# Altium PCB CSU18M88+CS1259-V1.1.PcbDoc (part 1 of 2)
Units mm, origin at the board's own origin, x right, y up, seen from the top; angles counter-clockwise.
Board outline 33.46 x 68.06 mm, 2 copper layers (TopLayer, BottomLayer); 63 components, 66 nets, 230 pads, 165 vias.
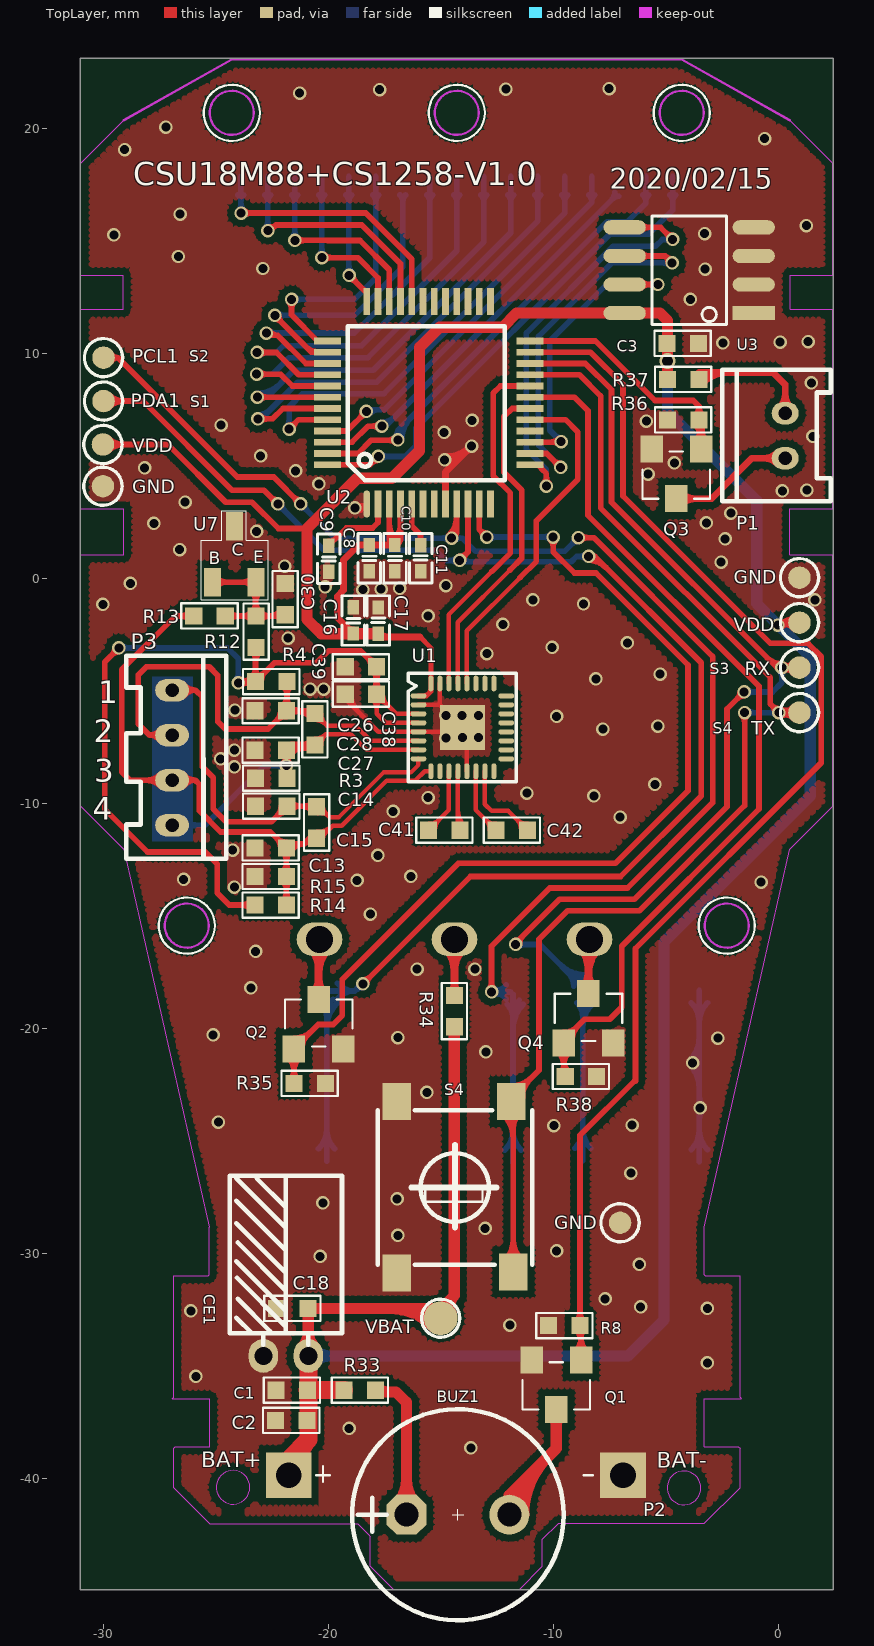
[diagram p0: TopLayer view]
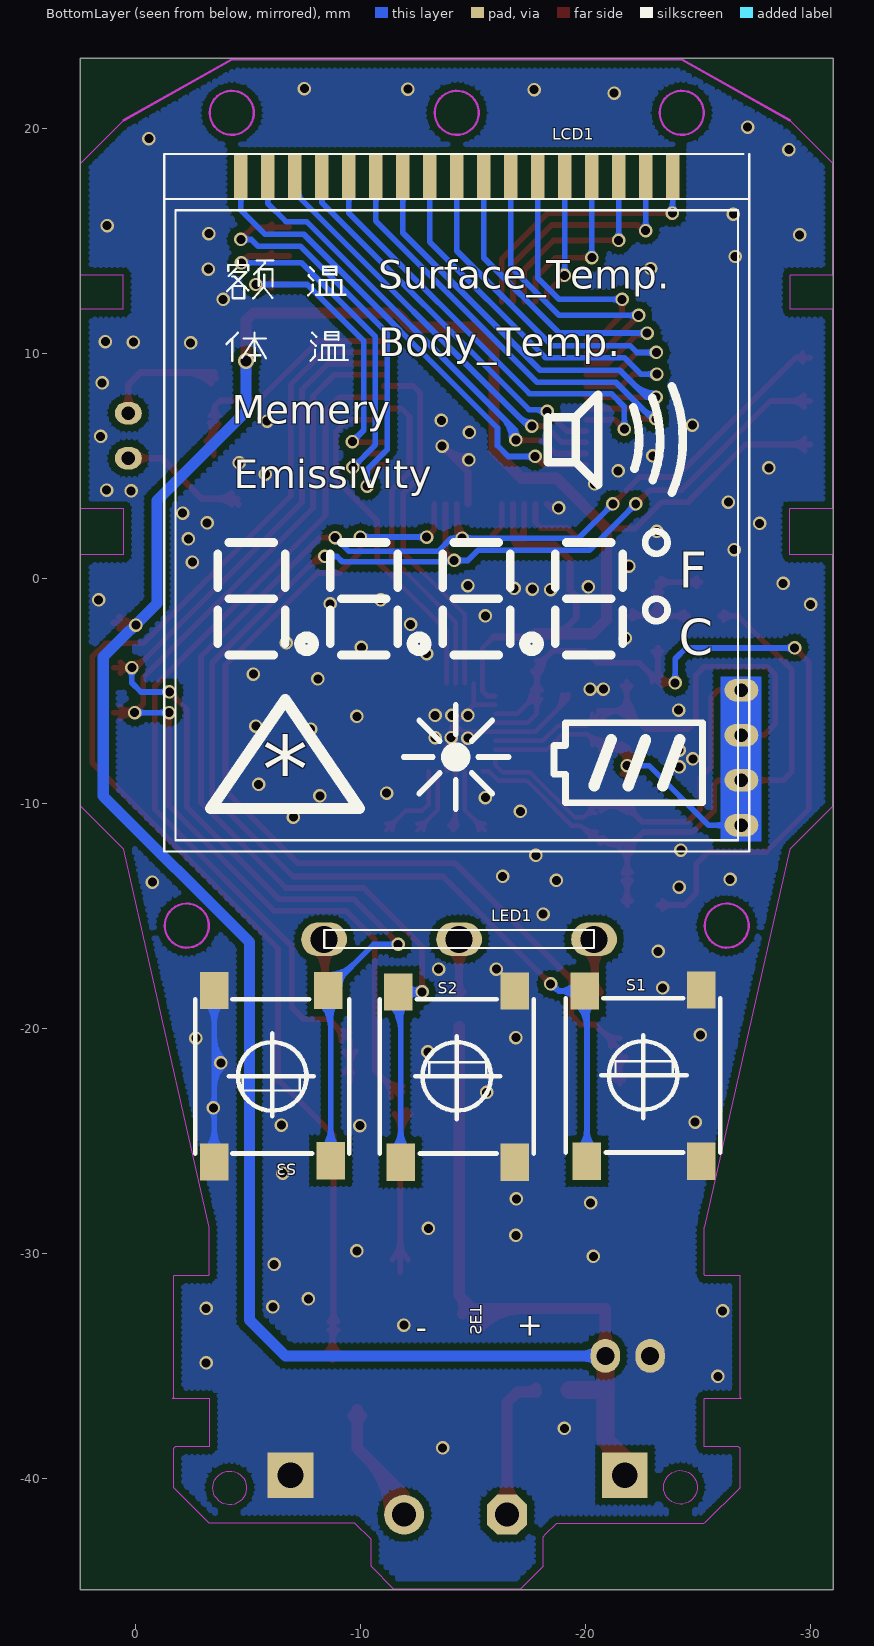
[diagram p1: BottomLayer view, seen from below]

## Layer stack, top to bottom
TopLayer: signal copper 0.0356
Dielectric: dielectric 0.32, FR-4, Dk 4.8
BottomLayer: signal copper 0.0356

## Board outline
-31.025,-44.958 2.436,-44.958 2.436,23.106 -31.025,23.106

## Design rules (kind name [scope] priority, off if disabled: settings)
Clearance [All] p1: gap=0.3
ComponentClearance [All] p1 off: gap=0.254 collisioncheckmode=3 verticalgap=0.254 showdistances=FALSE
FabricationTestPointUsage TestPointUsage [All] p1 off: valid=0 allowmultiple=FALSE
FabricationTestpoint Testpoint [All] p1 off: side=3 testpointundercomponent=TRUE minsize=1.016 maxsize=2.54 preferedsize=1.524 minholesize=0.508 maxholesize=1.016 preferedholesize=0.813 testpointgrid=0.025 allowsidetop=TRUE allowsidebottom=TRUE usegrid=TRUE gridtolerance=0
PasteMaskExpansion [All] p1 off: expansion=0
PlaneClearance [All] p1 off: clearance=0.508
PlaneConnect [All] p1 off: planeconnectstyle=Relief reliefexpansion=0.508 reliefentries=4 reliefconductorwidth=0.254 reliefairgap=0.254
PolygonConnect [All] p1: connectstyle=Direct reliefconductorwidth=0.508 reliefentries=4 polygonreliefangle="90 Angle" airgapwidth=0.254
RoutingCorners [All] p1: cornerstyle=45-Degree minsetback=0.203 maxsetback=25.4
RoutingVias [All] p1: holewidth=0.432 width=0.813 viastyle="Through Hole" minholewidth=0.432 minwidth=0.813 maxholewidth=0.432 maxwidth=0.813
SilkscreenOverComponentPads [All] p1: minsilkscreentomaskgap=0.254
SolderMaskExpansion [All] p1 off: expansion=0.102
Width [All] p1: maxlimit=5.08 minlimit=0.025 preferedwidth=0.191
20 further rules are at their usual default settings.

## Classes and differential pairs
component class CSU18M88+CS1258额温枪-V1.0: BUZ1 C1 C2 C3 C10 C11 C13 C14 C15 C18 C26 C27 C28 C30 C38 C39 C41 C42 GND GND2 LCD1 LED1 LED2 P1 PCL1 PDA1 Q1 Q2 Q3 Q4 R3 R4 R8 R12 R13 R14 R15 R33 R34 R35 R36 R37 R38 RX S1 S2 S3 S4 TX U1 U2 U3 U6 U7 VBAT VDD2

## Components (designator, comment, footprint, x,y, rotation, side; value= is the part's Value field where it differs from the comment)
BUZ1 "BUZZER" BUZS9.5*6 -16.53,-41.631 r0 top
C1 "10uF" C0603E -20.93,-36.093 r180 top
C2 "0.1uF" C0603E -20.955,-37.44 r180 top
C3 "100nF" C0603E -4.953,10.439 r0 top
C8 "10uF" C0402 -18.186,1.473 r270 top (schematic designator C10)
C9 "1uF" C0402 -19.99,1.448 r270 top (schematic designator C10)
C10 "0.1uF" C0402 -17.043,1.473 r270 top
C11 "1uF" C0402 -15.9,0.305 r90 top
C13 "120pF" C0603E -21.869,-11.989 r180 top
C14 "120pF" C0603E -23.241,-10.135 r0 top
C15 "NC" C0603E -20.523,-11.557 r90 top
C16 "10uF" C0402 -18.898,-1.295 r270 top (schematic designator C10)
C17 "0.1uF" C0402 -17.78,-2.464 r90 top (schematic designator C10)
C18 "0.1uF" C0603E -20.904,-32.461 r180 top
C26 "120pF" C0603E -23.266,-5.893 r0 top
C27 "120pF" C0603E -21.869,-7.645 r180 top
C28 "NC" C0603E -20.599,-7.417 r90 top
C30 "NC" C0603E -21.92,-0.229 r270 top
C38 "1uF" C0603E -17.856,-5.156 r180 top
C39 "120pF" C0603E -17.856,-3.937 r180 top
C41 "0.1uF" C0603E -14.148,-11.201 r180 top
C42 "NC" C0603E -12.548,-11.201 r0 top
CE1 "220UF/10V" CD11C5X7W -21.895,-34.569 r180 top
GND "" "TEST-SMD 1.5"#1 -7.036,-28.651 r90 top (schematic designator GND2)
GND "" "TEST-SMD 1.5"#1 -30.023,4.089 r90 top (schematic designator GND2)
GND "" "TEST-SMD 1.5"#1 0.94,0.025 r90 top (schematic designator GND2)
LCD1 "13x4" LCD_13X4_TZL3304_体温 -14.295,17.856 r180 bottom locked
LED1 "白光" YTSG-3326E-1PRGF03B -14.396,-16.053 r0 bottom locked
P1 "激光（NC)SIP2" COM-2 0.305,5.334 r90 top
P2 "电池" 1809BAT -21.768,-39.878 r0 top
P3 "DIP4" COM-4 -26.949,-4.978 r270 top
PCL1 "" "TEST-SMD 1.5"#1 -29.997,9.804 r90 top
PDA1 "" "TEST-SMD 1.5"#1 -29.997,7.874 r90 top
Q1 "S8050" SOT-23S -9.855,-36.957 r180 top
Q2 "S8050" SOT-23S -20.447,-18.72 r0 top
Q3 "S8050" SOT-23S -4.521,3.531 r180 top
Q4 "S8050" SOT-23S -8.458,-18.466 r0 top
R3 "51K0.1%" R0603E -21.844,-8.89 r180 top
R4 "51K0.1%" R0603E -23.241,-4.597 r0 top
R8 "100K" R0603E -8.814,-33.223 r180 top
R12 "NC" R0603E -23.216,-3.073 r90 top
R13 "NC" R0603E -24.587,-1.676 r180 top
R14 "10K" R0603E -21.869,-14.529 r180 top
R15 "10K" R0603E -23.266,-13.259 r0 top
R33 "" R0603E -19.304,-36.093 r0 top
R34 "330" R0603E -14.402,-19.939 r90 top
R35 "100K" R0603E -21.533,-22.46 r0 top
R36 "100K" R0603E -3.531,7.036 r180 top
R37 "470R" R0603E -4.928,8.839 r0 top
R38 "100K" R0603E -9.474,-22.149 r0 top
RX "" "TEST-SMD 1.5"#1 0.94,-3.975 r0 top
S1 "UP" SW-4X6_SMD -22.575,-22.098 r180 bottom locked
S2 "SET" SW-4X6_SMD -14.295,-22.144 r180 bottom locked
S3 "DOWN" SW-4X6_SMD -6.095,-22.144 r0 bottom locked
S4 "UNIT" SW-4X6 -14.371,-27.076 r180 top locked
TX "" "TEST-SMD 1.5"#1 0.94,-5.975 r0 top
U1 "CS1258" QFN32_4X4 -14.046,-6.629 r90 top locked
U2 "CSU18M88-LQFP48" LQFP48 -15.545,7.798 r90 top locked
U3 "24C02" SMD8 -1.092,11.786 r90 top locked
U7 "TL432-0.5%(NC)" SOT-23-1B2E3C -25.146,-0.178 r0 top
VBAT "" "TEST-SMD 1.5"#2 -15.011,-32.893 r90 top (schematic designator VDD2)
VDD "" "TEST-SMD 1.5"#1 -30.023,5.944 r0 top (schematic designator TX)
VDD "" "TEST-SMD 1.5"#1 0.94,-1.975 r0 top (schematic designator TX)

## Footprints (in the part's own frame and the unit in brackets; to place one, negate y for a bottom-side part, rotate by r counter-clockwise, add the part's x,y. Pads: shape width x height; smd on the part's side, far side on the other; paste and mask are expansions set on the pad)
1809BAT [mil]
  rect 80x80 hole 45: 1(0.06,0.33) 2(585.06,0.33)
  silkscreen extent 48,-12 532,16
BUZS9.5*6 [mil]
  oct 70x70 hole 42: 1(0,0)
  round 70 hole 42: 2(180,0)
  silkscreen extent -95,-185 275,185
C0402 [mil]
  rect 25x20 smd: 1(0,0) 2(45.87,0)
  silkscreen extent -20,-20 66,20
C0603E [mil]
  rect 30x30 smd: 1(0,0) 2(55,0)
  silkscreen extent -22,-22 77,22
CD11C5X7W [mm]
  oval 1.3x1.5 hole 0.8: 1(-1,0) 2(1,0)
  silkscreen extent -2.5,-8 2.5,-0.5
COM-2 [mm]
  oval 1x1.2 hole 0.6: 1(0,0) 2(2,0)
  silkscreen extent -1.91,-2.03 3.94,2.79
COM-4 [mm]
  oval 1x1.5 hole 0.6: 1(0,0) 2(2,0) 3(4,0) 4(6,0)
  silkscreen extent -1.52,-2.03 7.49,2.41
LCD_13X4_TZL3304_体温 [mm]
  rect 0.6x2 smd: 1(9.6,0) 2(8.4,0) 3(7.2,0) 4(6,0) 5(4.8,0) 6(3.6,0) 7(2.4,0) 8(1.2,0) 9(0,0) 10(-1.2,0) 11(-2.4,0) 12(-3.6,0) 13(-4.8,0) 14(-6,0) 15(-7.2,0) 16(-8.4,0) 17(-9.6,0)
  silkscreen extent -13,-30 13,1
LQFP48 [mm]
  oval 1.2x0.3 smd: 1(-4.5,2.75)
  rect 1.2x0.3 smd: 2(-4.5,2.25) 3(-4.5,1.75) 4(-4.5,1.25) 5(-4.5,0.75) 6(-4.5,0.25) 7(-4.5,-0.25) 8(-4.5,-0.75) 9(-4.5,-1.25) 10(-4.5,-1.75) 11(-4.5,-2.25) 12(-4.5,-2.75) 25(4.5,-2.75) 26(4.5,-2.25) 27(4.5,-1.75) 28(4.5,-1.25) 29(4.5,-0.75) 30(4.5,-0.25) 31(4.5,0.25) 32(4.5,0.75) 33(4.5,1.25) 34(4.5,1.75) 35(4.5,2.25) 36(4.5,2.75)
  rect 0.3x1.2 smd: 13(-2.75,-4.5) 14(-2.25,-4.5) 15(-1.75,-4.5) 16(-1.25,-4.5) 17(-0.75,-4.5) 18(-0.25,-4.5) 19(0.25,-4.5) 20(0.75,-4.5) 21(1.25,-4.5) 22(1.75,-4.5) 23(2.25,-4.5) 24(2.75,-4.5) 37(2.75,4.5) 38(2.25,4.5) 39(1.75,4.5) 40(1.25,4.5) 41(0.75,4.5) 42(0.25,4.5) 43(-0.25,4.5) 44(-0.75,4.5) 45(-1.25,4.5) 46(-1.75,4.5) 47(-2.25,4.5) 48(-2.75,4.5)
  silkscreen extent -3.45,-3.39 3.41,3.59
QFN32_4X4 [mm]
  oval 0.23x0.7 smd: 1(1.4,1.95) 2(1,1.95) 3(0.6,1.95) 4(0.2,1.95) 5(-0.2,1.95) 6(-0.6,1.95) 7(-1,1.95) 8(-1.4,1.95) 17(-1.4,-1.95) 18(-1,-1.95) 19(-0.6,-1.95) 20(-0.2,-1.95) 21(0.2,-1.95) 22(0.6,-1.95) 23(1,-1.95) 24(1.4,-1.95)
  oval 0.7x0.23 smd: 9(-1.95,1.4) 10(-1.95,1) 11(-1.95,0.6) 12(-1.95,0.2) 13(-1.95,-0.2) 14(-1.95,-0.6) 15(-1.95,-1) 16(-1.95,-1.4) 25(1.95,-1.4) 26(1.95,-1) 27(1.95,-0.6) 28(1.95,-0.2) 29(1.95,0.2) 30(1.95,0.6) 31(1.95,1) 32(1.95,1.4)
  rrect0% 2x2 smd: 33(0,0)
  silkscreen extent -2.42,-2.39 2.4,2.4
R0603E [mil]
  rect 30x30 smd: 1(0,0) 2(55,0)
  silkscreen extent -22,-22 77,22
SMD8 [mil]
  rect 25x74 smd: 1(0,0)
  oval 25x74 smd: 2(50,0) 3(100,0) 4(150,0) 5(150,226) 6(100,226) 7(50,226) 8(0,226)
  silkscreen extent -20,48 170,178
SOT-23-1B2E3C [mil]
  rect 30x50 smd: 1(0,0) 2(76,0) 3(38,98)
  silkscreen extent -20,-31 97,125
SOT-23S [mm]
  rect 1x1.2 smd: 1(-1.086,-2.202) 2(1.114,-2.202) 3(0.014,-0.002)
  silkscreen extent -1.49,-2.1 1.51,0
SW-4X6 [mil]
  rect 50x65 smd: 1(-102,148) 2(-98,-150) 3(102,-150) 4(102,150)
  silkscreen extent -135,-135 135,135
SW-4X6_SMD [mil]
  rect 50x65 smd: 1(-102.27,147.65) 2(-98.27,-150.35) 3(101.73,-150.35) 4(101.73,149.65)
  silkscreen extent -135,-135 135,135
"TEST-SMD 1.5"#1 [mm]
  round 1 smd: 1(0,0)
  silkscreen extent -0.85,-0.85 0.85,0.85
"TEST-SMD 1.5"#2 [mm]
  round 1.5 smd: 1(0,0)
  silkscreen extent -0.85,-0.85 0.85,0.85
YTSG-3326E-1PRGF03B [mm]
  oval 2.032x1.5 hole 1.2: 1(-6,0) 2(0,0) 3(6,0)
  silkscreen extent -6,-0.42 6,0.38

## Part data
BUZ1: library part Speaker
C1 C3: library part "Cap Semi", "Capacitor (Semiconductor SIM Model)"
C2 C13 C14 C15 C18 C26 C27 C28 C30: library part "Cap Semi", "Capacitor (Semiconductor S"
C11: library part CAP
LCD1: library part Compone
LED1: library part LED0, "Typical INFRARED GaAs LED"
P1 P2: library part He
Q1 Q2: library part NPN, "NPN三?"
Q3 Q4: library part N
R3 R4: library part Res1, "Resistor"
R8: library part R, "电?"
R12 R13 R14 R15 R33 R34 R37: library part Res1
S1 S2 S3 S4: library part SW-PB, "Switch"
U3: library part Component_2

## Via types
v1: diameter 0.6, hole 0.4, TopLayer to BottomLayer, 164 vias
v2: diameter 0.7, hole 0.5, TopLayer to BottomLayer, 1 vias

## Nets (pads, with @x,y where several pads share a name; then routed paths per layer and width w, separated by ;. In a path a pad name is that pad's centre, name@x,y a point inside that pad or via, vN(x,y) a via of type N, cw(c..) or ccw(c..) an arc to the next point about the centre after c; other vN are vias at no path point)
24C02_SCL: U2.14 U3.6 | length 20.7
  TopLayer w0.254: U2.14@-11.045,5.548 -10.298,5.548 v1(-9.677,4.928) ; v1@-9.85,4.928 ccw(c-10.268,4.928) -9.973,5.223 ccw(c-9.677,5.518) v1@-9.677,5.101 ; U3.6@-6.833,14.326 -5.029,14.326 v1(-4.724,14.021) ; U3.6@-6.076,14.191 cw(c-5.75,13.866) -5.75,14.326 cw(c-5.75,14.786) U3.6@-6.076,14.46 ; v1@-4.897,14.021 ccw(c-5.315,14.021) -5.02,14.316 ccw(c-4.724,14.611) v1@-4.724,14.194
  BottomLayer w0.254: v1@-9.85,4.928 ccw(c-10.268,4.928) -9.973,5.223 ccw(c-9.677,5.518) v1@-9.677,5.101 ; v1(-9.677,4.928) -10.668,5.918 -10.668,10.744 -7.391,14.021 v1(-4.724,14.021) ; v1@-4.847,13.898 ccw(c-5.142,13.603) -5.142,14.021 ccw(c-5.142,14.438) v1@-4.847,14.143
24C02_SDA: U2.13 U3.5 | length 22.8
  TopLayer w0.254: U2.13@-11.045,5.048 -10.712,5.048 -10.312,4.648 v1(-10.312,4.089) ; U2.13@-10.572,5.048 ccw(c-10.233,5.048) -10.473,4.808 ; v1@-10.435,4.212 ccw(c-10.73,4.507) -10.312,4.507 ccw(c-9.895,4.507) v1@-10.19,4.212 ; U3.5@-6.833,15.596 -5.232,15.596 v1(-4.699,15.062) ; U3.5@-6.076,15.461 cw(c-5.75,15.136) -5.75,15.596 cw(c-5.75,16.056) U3.5@-6.076,15.73 ; v1@-4.872,15.062 ccw(c-5.29,15.062) -4.994,15.358 ccw(c-4.699,15.653) v1@-4.699,15.235
  BottomLayer w0.254: v1@-10.435,4.212 ccw(c-10.73,4.507) -10.312,4.507 ccw(c-9.895,4.507) v1@-10.19,4.212 ; v1(-10.312,4.089) -10.312,4.826 -11.201,5.715 -11.201,10.898 -7.342,14.757 -5.461,14.757 -5.156,15.062 v1(-4.699,15.062) ; v1@-4.821,14.94 ccw(c-5.117,14.645) -5.117,15.062 ccw(c-5.117,15.48) v1@-4.821,15.185
24C02_WP: U2.15 U3.7 | length 16.7
  TopLayer w0.254: U2.15@-11.045,6.048 -9.675,6.048 v1(-9.652,6.071) ; -10.125,6.048 ccw(c-10.125,6.543) v1@-9.774,6.193 ; -10.015,6.048 cw(c-10.015,5.708) v1@-9.774,5.948 ; U3.7@-6.833,13.056 v1(-5.359,13.056) ; U3.7@-6.076,12.921 cw(c-5.75,12.596) -5.75,13.056 cw(c-5.75,13.516) U3.7@-6.076,13.19 ; v1@-5.482,12.933 ccw(c-5.777,12.638) -5.777,13.056 ccw(c-5.777,13.473) v1@-5.482,13.178
  BottomLayer w0.254: v1@-9.825,6.071 ccw(c-10.243,6.071) -9.947,6.366 ccw(c-9.652,6.661) v1@-9.652,6.244 ; v1(-9.652,6.071) -10.16,6.579 -10.16,10.541 -7.645,13.056 v1(-5.359,13.056) ; v1@-5.482,12.933 ccw(c-5.777,12.638) -5.777,13.056 ccw(c-5.777,13.473) v1@-5.482,13.178
AIN0: C26.2 C28.2 P3.2 R4.2 U1.6 | length 27.8
  TopLayer w0.2: C28.2@-20.599,-6.301 cw(c-20.599,-6.979) -20.12,-6.499 cw(c-19.64,-6.02) C28.2@-20.318,-6.02 ; C28.2@-20.599,-6.02 -20.066,-6.553 -18.796,-6.553 -18.12,-7.229 U1.6@-15.996,-7.229
  TopLayer w0.254: P3.2@-27.498,-7.203 ccw(c-27.947,-7.54) -27.947,-6.978 ; P3.2@-27.498,-6.754 cw(c-27.947,-6.417) -27.947,-6.978 ; P3.2@-26.949,-6.978 -27.947,-6.978 ; C26.2@-22.123,-5.893 cw(c-22.737,-5.893) -22.303,-6.326 cw(c-21.869,-6.76) C26.2@-21.869,-6.147 ; C26.2@-22.049,-5.713 ccw(c-22.544,-5.218) -21.844,-5.218 ; R4.2@-22.024,-4.777 cw(c-22.457,-5.211) -21.844,-5.211 cw(c-21.231,-5.211) R4.2@-21.664,-4.777 ; -21.844,-5.341 ccw(c-21.318,-5.341) -21.69,-5.713 ccw(c-21.256,-5.28) -21.256,-5.893 ccw(c-21.256,-6.506) C26.2@-21.69,-6.072 ; R4.2@-21.844,-4.597 -21.844,-5.867 C26.2@-21.869,-5.893 ; C26.2@-21.519,-5.893 cw(c-21.519,-6.94) C28.2@-20.779,-6.199 ; C28.2@-20.599,-5.893 C26.2@-21.869,-5.893 ; -27.947,-6.978 -28.448,-6.477 -28.448,-4.293 -28.092,-3.937 -25.298,-3.937 -24.917,-4.318 -24.917,-6.375 -24.587,-6.706 -22.682,-6.706 C26.2@-21.869,-5.893
AIN1: C27.1 C28.1 P3.4 R3.1 U1.7 | length 24.5
  TopLayer w0.2: C28.1@-20.599,-7.417 -20.117,-6.934 -18.999,-6.934 -18.304,-7.629 U1.7@-15.996,-7.629 ; C28.1@-20.599,-7.136 ccw(c-20.599,-6.457) -20.12,-6.937 ccw(c-19.64,-7.417) C28.1@-20.318,-7.417
  TopLayer w0.254: C27.1@-22.049,-7.825 cw(c-22.544,-8.32) v1@-21.844,-8.32 ; R3.1@-22.024,-8.71 ccw(c-22.457,-8.277) -21.844,-8.277 ccw(c-21.231,-8.277) R3.1@-21.664,-8.71 ; v1@-21.992,-8.454 cw(c-22.348,-8.81) R3.1@-21.844,-8.81 ; v1@-21.992,-8.209 ccw(c-22.348,-7.852) C27.1@-21.844,-7.852 ; v1@-21.982,-8.2 ccw(c-22.1,-8.063) -21.925,-8.016 ccw(c-21.684,-7.951) v1@-21.794,-8.176 ; v1@-21.955,-8.181 ccw(c-22.143,-7.853) -21.778,-7.951 ccw(c-21.454,-8.038) v1@-21.728,-8.231 ; R3.1@-21.844,-8.89 C27.1@-21.844,-7.671 ; R3.1@-21.844,-8.688 cw(c-21.513,-8.688) v1@-21.747,-8.454 ; v1@-21.844,-8.197 cw(c-21.318,-8.197) C27.1@-21.69,-7.825 ; C27.1@-21.844,-7.975 ccw(c-21.513,-7.975) v1@-21.747,-8.209
  TopLayer w0.3: C27.1@-21.918,-7.597 cw(c-21.484,-8.031) -21.484,-7.417 ; C27.1@-21.869,-7.645 -21.641,-7.417 C28.1@-20.599,-7.417 ; C27.1@-21.706,-7.809 cw(c-20.76,-8.755) C28.1@-20.76,-7.417 ; -21.246,-7.547 cw(c-21.065,-8.223) C28.1@-20.715,-7.617 ; -21.052,-7.495 ccw(c-21.16,-7.093) C28.1@-20.799,-7.301 ; C28.1@-20.763,-7.58 ccw(c-21.157,-7.974) -21.157,-7.417 ccw(c-21.157,-6.859) C28.1@-20.763,-7.253
  BottomLayer w0.254: P3.4@-26.949,-10.978 -25.482,-10.978 -22.835,-8.331 v1(-21.869,-8.331) ; P3.4@-26.436,-11.242 cw(c-25.799,-11.879) -25.799,-10.978 cw(c-25.799,-10.078) P3.4@-26.436,-10.715 ; v1@-21.992,-8.454 ccw(c-22.287,-8.749) -22.287,-8.331 ccw(c-22.287,-7.914) v1@-21.992,-8.209
AIN2: C14.2 C15.2 P3.1 U1.8 | length 22.6
  TopLayer w0.2: C15.2@-20.482,-10.438 cw(c-20.388,-11.067) -19.939,-10.617 ; C15.2@-20.422,-10.135 -19.939,-10.617 ; C15.2@-20.242,-10.16 ccw(c-19.87,-10.16) -20.133,-10.423 ; U1.8@-15.996,-8.029 -15.996,-8.3 -16.332,-8.636 -17.551,-8.636 -19.533,-10.617 -19.939,-10.617
  TopLayer w0.254: P3.1@-26.949,-4.978 -25.908,-4.978 ; P3.1@-26.412,-5.216 cw(c-25.908,-5.631) -25.908,-4.978 ; P3.1@-26.412,-4.741 ccw(c-25.908,-4.325) -25.908,-4.978 ; C14.2@-22.098,-10.135 cw(c-22.711,-10.135) -22.278,-10.568 cw(c-21.844,-11.002) C14.2@-21.844,-10.389 ; C14.2@-21.664,-10.314 cw(c-21.231,-10.748) -21.231,-10.135 cw(c-21.231,-9.521) C14.2@-21.664,-9.955 ; -21.198,-10.135 cw(c-21.198,-10.835) C15.2@-20.703,-10.34 ; -21.075,-10.135 ccw(c-21.075,-9.608) C15.2@-20.703,-9.98 ; C15.2@-20.422,-10.135 C14.2@-21.844,-10.135 -22.533,-10.824 -24.559,-10.824 -25.121,-10.262 -25.121,-8.865 -25.603,-8.382 -25.603,-5.283 -25.908,-4.978
AIN3: C13.1 C15.1 P3.3 R13.2 R14.1 R15.2 U1.9 | length 39.3
  TopLayer w0.2: C15.1@-20.521,-11.476 ccw(c-20.504,-10.959) -20.139,-11.325 ; C15.1@-20.514,-11.276 ccw(c-20.484,-10.326) -19.812,-10.998 ; C15.1@-20.371,-11.557 -19.812,-10.998 ; C15.1@-20.242,-11.557 cw(c-19.932,-11.557) C15.1@-20.151,-11.337 ; U1.9@-15.446,-8.579 -15.717,-8.579 -16.133,-8.996 -17.402,-8.996 -19.404,-10.998 -19.812,-10.998
  TopLayer w0.254: P3.3@-27.463,-9.242 ccw(c-28.1,-9.879) -28.1,-8.978 ccw(c-28.1,-8.078) P3.3@-27.463,-8.715 ; P3.3@-26.409,-9.212 cw(c-25.921,-9.604) -25.921,-8.978 ; P3.3@-26.409,-8.745 ccw(c-25.921,-8.353) -25.921,-8.978 ; R13.2@-26.164,-1.856 ccw(c-26.597,-2.29) -26.597,-1.676 ccw(c-26.597,-1.063) R13.2@-26.164,-1.497 ; R13.2@-25.984,-1.676 -26.797,-1.676 -29.185,-4.064 -29.185,-8.611 -28.817,-8.978 P3.3@-26.949,-8.978 -25.921,-8.978 ; C13.1@-22.123,-11.989 ccw(c-22.737,-11.989) -22.303,-11.555 ccw(c-21.869,-11.122) C13.1@-21.869,-11.735 ; R14.1@-22.049,-14.349 ccw(c-22.483,-13.916) -21.869,-13.916 ccw(c-21.256,-13.916) R14.1@-21.69,-14.349 ; R15.2@-22.049,-13.438 cw(c-22.483,-13.872) -21.869,-13.872 cw(c-21.256,-13.872) R15.2@-21.69,-13.438 ; R15.2@-22.049,-13.079 ccw(c-22.483,-12.646) -21.869,-12.646 ccw(c-21.256,-12.646) R15.2@-21.69,-13.079 ; C13.1@-22.049,-12.168 cw(c-22.483,-12.602) -21.869,-12.602 cw(c-21.256,-12.602) C13.1@-21.69,-12.168 ; R14.1@-21.869,-14.529 R15.2@-21.869,-13.259 ; R15.2@-21.869,-13.056 C13.1@-21.869,-11.989 ; C13.1@-21.655,-12.125 cw(c-21.082,-12.491) -21.082,-11.811 ; C15.1@-20.663,-11.769 ccw(c-20.847,-12.046) -21.082,-11.811 ; C15.1@-20.371,-11.557 C15.1@-20.523,-11.557 -20.828,-11.557 -21.082,-11.811 ; -25.921,-8.978 -25.73,-9.169 -25.73,-10.338 -24.79,-11.278 -22.581,-11.278 C13.1@-21.869,-11.989 ; C13.1@-21.869,-11.989 -21.869,-11.811 -21.082,-11.811
AMB: 
BLIGHT1: Q2.1 R35.1 U2.11 | length 50
  TopLayer w0.254: Q2.1@-21.797,-21.285 cw(c-22.434,-21.922) -21.533,-21.922 cw(c-20.633,-21.922) Q2.1@-21.269,-21.285 ; R35.1@-21.713,-22.28 ccw(c-22.146,-21.846) -21.533,-21.846 ccw(c-20.92,-21.846) R35.1@-21.354,-22.28 ; R35.1@-21.533,-22.46 Q2.1@-21.533,-20.922 -20.449,-19.837 -19.787,-19.837 -19.38,-19.431 -19.38,-17.831 -14.224,-12.675 -7.239,-12.675 -4.013,-9.449 -4.013,-3.861 -8.103,0.229 -9.068,0.229 -10.008,1.168 v1(-10.008,1.829) ; Q2.1@-21.533,-20.449 ccw(c-21.533,-19.307) -20.726,-20.114 ; Q2.1@-21.16,-20.822 cw(c-20.501,-20.822) -20.967,-20.356 ; U2.11@-13.295,3.298 -13.295,2.17 v1(-12.954,1.829) ; v1@-13.127,1.829 ccw(c-13.545,1.829) -13.249,2.124 ccw(c-12.954,2.419) v1@-12.954,2.002 ; v1@-10.13,1.706 cw(c-10.425,1.411) -10.008,1.411 cw(c-9.59,1.411) v1@-9.885,1.706
  BottomLayer w0.254: v1(-12.954,1.829) v1(-10.008,1.829) ; v1@-12.832,1.706 cw(c-12.536,1.411) -12.536,1.829 cw(c-12.536,2.246) v1@-12.832,1.951 ; v1@-10.13,1.706 ccw(c-10.425,1.411) -10.425,1.829 ccw(c-10.425,2.246) v1@-10.13,1.951
BLIGHT2: Q4.1 R38.1 U2.19 | length 43.9
  TopLayer w0.254: U2.19@-11.045,8.048 -9.064,8.048 -8.458,7.442 -8.458,2.794 -0.864,-4.801 -0.864,-10.262 -6.96,-16.358 -6.96,-19.075 -7.493,-19.609 -8.611,-19.609 -9.544,-20.543 Q4.1@-9.544,-20.668 -9.544,-22.358 R38.1@-9.5,-22.403 ; Q4.1@-9.808,-21.031 cw(c-10.445,-21.668) -9.544,-21.668 cw(c-8.644,-21.668) Q4.1@-9.281,-21.031 ; R38.1@-9.654,-21.969 ccw(c-9.918,-21.705) -9.544,-21.705 ; -9.544,-21.366 ccw(c-8.692,-21.366) R38.1@-9.295,-21.969 ; Q4.1@-9.544,-20.195 ccw(c-9.544,-19.355) -8.951,-19.949 ; Q4.1@-9.171,-20.568 cw(c-8.21,-20.568) -8.89,-19.888
BUZZER: Q1.1 R8.1 U2.23 | length 60.5
  TopLayer w0.254: U2.23@-11.045,10.048 -8.346,10.048 -6.909,8.611 -6.909,3.658 -0.356,-2.896 1.321,-2.896 1.905,-3.48 1.905,-8.204 -6.35,-16.459 -6.35,-22.352 ; Q1.1@-9.033,-34.391 ccw(c-9.669,-33.755) -8.769,-33.755 ccw(c-7.869,-33.755) Q1.1@-8.505,-34.391 ; R8.1@-8.993,-33.403 cw(c-9.535,-33.945) -8.769,-33.945 ; R8.1@-8.993,-33.044 ccw(c-9.427,-32.61) -8.814,-32.61 ccw(c-8.201,-32.61) R8.1@-8.634,-33.044 ; R8.1@-8.814,-33.223 -8.814,-24.765 -6.401,-22.352 ; Q1.1@-8.769,-34.755 R8.1@-8.769,-33.223 ; -8.769,-33.728 cw(c-8.309,-33.728) R8.1@-8.634,-33.403
COM0: LCD1.17 U2.48 | length 24
  TopLayer w0.254: U2.48@-20.045,5.048 -18.142,5.048 v1(-17.78,5.41) ; v1@-17.953,5.41 cw(c-18.371,5.41) -18.075,5.115 cw(c-17.78,4.82) v1@-17.78,5.237
  BottomLayer w0.254: v1(-17.78,5.41) -16.586,5.41 -16.104,5.893 -16.104,6.68 -7.493,15.291 -5.766,15.291 -4.695,16.362 LCD1.17@-4.695,17.856 ; v1@-17.658,5.288 cw(c-17.362,4.993) -17.362,5.41 cw(c-17.362,5.828) v1@-17.658,5.533 ; LCD1.17@-4.817,17.034 cw(c-5.112,16.739) -4.695,16.739 cw(c-4.277,16.739) LCD1.17@-4.572,17.034
COM1: LCD1.16 U2.47 | length 23.8
  TopLayer w0.254: U2.47@-20.045,5.548 -18.684,5.548 -18.102,6.129 -16.934,6.129 v1(-16.916,6.147) ; -17.376,6.129 ccw(c-17.376,6.606) v1@-17.039,6.269 ; -17.292,6.129 cw(c-17.292,5.771) v1@-17.039,6.024
  BottomLayer w0.254: v1@-17.036,6.271 ccw(c-17.307,6.553) -16.916,6.553 ; v1@-16.997,6.147 cw(c-16.212,6.147) -16.767,6.702 ; v1(-16.916,6.147) -16.916,6.553 ; v1@-16.796,6.271 cw(c-16.526,6.553) -16.916,6.553 ; v1@-16.743,6.147 cw(c-15.345,6.147) -16.334,7.136 ; LCD1.16@-6.017,17.034 cw(c-6.312,16.739) -5.895,16.739 cw(c-5.477,16.739) LCD1.16@-5.772,17.034 ; LCD1.16@-5.895,17.856 -5.895,16.661 -6.706,15.85 -7.62,15.85 -16.916,6.553
COM2: LCD1.15 U2.46 | length 19.3
  TopLayer w0.254: U2.46@-20.045,6.048 -18.946,6.048 -18.237,6.756 v1(-17.628,6.756) ; v1@-17.75,6.634 ccw(c-18.045,6.339) -18.045,6.756 ccw(c-18.045,7.174) v1@-17.75,6.879
  BottomLayer w0.254: v1(-17.628,6.756) -17.475,6.756 LCD1.15@-7.214,17.018 ; v1@-17.628,6.929 ccw(c-17.628,7.715) -17.072,7.159 ; -7.404,16.828 ccw(c-7.732,17.156) LCD1.15@-7.268,17.156 ; LCD1.15@-7.357,16.874 cw(c-7.095,16.612) LCD1.15@-7.095,16.983
COM3: LCD1.14 U2.45 | length 19
  TopLayer w0.254: U2.45@-20.045,6.548 -19.182,6.548 v1(-18.313,7.417) ; v1@-18.486,7.417 cw(c-18.904,7.417) -18.609,7.121 cw(c-18.313,6.826) v1@-18.313,7.244
  BottomLayer w0.254: v1(-18.313,7.417) -18.237,7.493 -17.501,7.493 -8.295,16.699 LCD1.14@-8.295,17.856 ; v1@-18.191,7.294 cw(c-17.712,6.815) -17.712,7.493 ; LCD1.14@-8.417,17.034 cw(c-8.712,16.739) -8.295,16.739 cw(c-7.877,16.739) LCD1.14@-8.172,17.034
CS1258_CS: U1.28 U2.17 | length 15.1
  TopLayer w0.2: U1.28@-13.846,-4.679 -13.846,-2.34 -11.481,0.025
  TopLayer w0.254: -11.481,0.025 -10.757,0.749 -10.757,2.553 -8.915,4.394 -8.915,6.502 -9.461,7.048 U2.17@-10.516,7.048
CS1258_SCL: U1.29 U2.18 | length 14.7
  TopLayer w0.2: U1.29@-14.246,-4.679 -14.246,-1.953 -11.926,0.368
  TopLayer w0.254: -11.926,0.368 -11.405,0.889 -11.405,3.919 -12.192,4.706 -12.192,7.188 -11.832,7.548 U2.18@-11.045,7.548
CS1258_SDA: U1.30 U2.20 | length 16.1
  TopLayer w0.2: U1.30@-14.646,-4.679 -14.646,-1.616 -12.726,0.304
  TopLayer w0.254: -12.726,0.304 -11.913,1.118 -11.913,3.785 -12.675,4.547 -12.675,8.23 -12.356,8.548 U2.20@-11.045,8.548
GND: C1.2 C2.2 C3.2 C8.2 C9.2 C10.2 C11.1 C13.2 C14.1 C16.1 C17.2 C18.2 C26.1 C27.2 C30.1 C38.2 C39.2 CE1.2 GND.1 P2.2 Q1.2 Q2.2 Q3.2 Q4.2 R3.2 R8.2 R15.1 R35.2 R36.2 R38.2 S1.3 S1.4 S2.3 S2.4 S3.3 S3.4 S4.3 S4.4 U1.2 U1.5 U1.13 U1.31 U1.33 U2.1 U2.8 U3.1 U3.2 U3.3 U3.4 U7.3 | length 38.3
  TopLayer w0.2: C38.2@-19.253,-5.156 -19.253,-5.359 -17.783,-6.829 U1.5@-15.996,-6.829 -14.576,-6.829 -14.376,-6.629 U1.33@-14.046,-6.629 ; C38.2@-19.172,-5.156 ccw(c-18.486,-5.156) -18.971,-5.641 ; C38.2@-18.972,-5.156 ccw(c-17.803,-5.156) -18.63,-5.983 ; U1.2@-15.996,-5.629 -15.046,-5.629 ; U1.31@-15.046,-4.679 -15.046,-5.629 ; U1.13@-13.846,-8.579 -13.846,-7.464 -14.046,-7.264 U1.33@-14.046,-6.629 ; -15.046,-5.629 U1.33@-14.046,-6.629
  TopLayer w0.254: v1@-18.869,3.059 ccw(c-18.704,3.286) -18.505,3.087 ; v1(-18.821,3.124) -18.468,3.124 ; v1@-18.769,3.124 ccw(c-18.769,3.772) U2.1@-18.311,3.314 ; v1@-18.72,3.264 ccw(c-18.527,3.53) U2.1@-18.295,3.298 -18.468,3.124 ; v1@-18.711,3.258 ccw(c-18.538,3.468) -18.468,3.205 ccw(c-18.385,2.897) v1@-18.668,3.044 ; v1@-18.685,3.018 cw(c-18.468,2.851) -18.468,3.124 ; v1@-18.685,3.23 ccw(c-18.468,3.398) -18.468,3.124
  TopLayer w0.3: v1@-14.841,5.108 ccw(c-14.796,6.063) -14.12,5.387 ; v1@-14.827,5.408 ccw(c-14.754,6.981) v1(-13.64,5.867) -14.795,4.712 U2.8@-14.795,3.298 ; v1@-13.79,5.867 cw(c-14.152,5.867) -13.896,5.611 cw(c-13.64,5.355) v1@-13.64,5.717
  BottomLayer w0.254: v1@-3.932,-21.662 cw(c-4.95,-22.68) -3.511,-22.68 ; v1@-3.932,-21.417 ccw(c-4.95,-20.399) -3.511,-20.399 ; S3.4@-3.87,-25.395 ccw(c-4.737,-24.528) -3.511,-24.528 ccw(c-2.284,-24.528) S3.4@-3.151,-25.395 ; S3.3@-3.87,-18.874 cw(c-4.737,-19.742) -3.511,-19.742 cw(c-2.284,-19.742) S3.3@-3.151,-18.874 ; v1@-3.753,-21.596 ccw(c-4.337,-21.012) -3.511,-21.012 ; v1@-3.753,-21.482 cw(c-4.337,-22.066) -3.511,-22.066 ; v1@-3.602,-23.668 cw(c-3.823,-23.889) -3.511,-23.889 ; v1@-3.602,-23.423 ccw(c-3.823,-23.203) -3.511,-23.203 ; -3.573,-21.776 ccw(c-3.724,-21.625) -3.511,-21.625 ; -3.573,-21.302 cw(c-3.724,-21.453) -3.511,-21.453 ; S3.4@-3.511,-25.945 S3.3@-3.511,-18.325 ; -3.511,-24.038 cw(c-2.988,-24.038) v1@-3.357,-23.668 ; -3.511,-23.054 ccw(c-2.988,-23.054) v1@-3.357,-23.423
  other v1: -13.665,-38.659 -19.075,-37.795 -25.896,-35.484 -3.15,-34.874 -11.938,-33.198 -26.111,-32.563 -3.15,-32.461 -6.121,-32.385 -7.696,-32.029 -6.172,-30.505 -20.371,-30.15 -9.855,-29.896 -16.916,-29.21 -13.03,-28.905 -20.244,-27.762 -16.942,-27.584 -6.553,-26.441 -9.982,-24.333 -6.502,-24.308 -24.892,-24.181 -3.48,-23.546 -15.621,-22.86 -3.81,-21.539 -13.005,-21.057 -2.692,-20.447 -16.916,-20.422 -25.121,-20.295 -23.444,-18.212 -16.053,-17.374 -13.487,-17.374 -23.241,-16.586 -18.136,-14.935 -24.181,-13.732 -0.762,-13.513 -18.72,-13.437 -26.441,-13.386 -16.332,-13.259 -17.805,-12.319 -24.257,-12.09 -7.036,-10.617 -17.12,-10.363 -15.57,-9.754 -8.204,-9.677 -11.176,-9.55 -5.486,-9.169 -24.181,-8.382 -24.79,-8.026 -24.181,-7.645 -14.783,-7.112 -14.046,-7.087 -13.335,-7.087 -7.798,-6.706 -5.359,-6.579 -9.855,-6.147 -14.783,-6.096 -14.072,-6.096 -13.335,-6.096 -24.155,-5.867 -20.816,-4.928 -20.218,-4.928 -8.116,-4.47 -5.258,-4.267 -12.954,-3.353 -10.058,-3.073 -6.706,-2.87 -21.793,-2.667 -12.243,-2.048 -15.57,-1.676 -30.023,-1.168 -8.661,-1.143 -10.91,-0.965 1.626,-0.965 -18.466,-0.508 -17.653,-0.483 -16.84,-0.457 -20.142,-0.381 -14.783,-0.33 -28.804,-0.229 -21.946,0.533 -2.54,0.711 -26.619,1.27 -2.362,1.753 -23.19,2.083 -27.762,2.438 -3.2,2.464 -2.108,2.896 -26.365,3.378 0.178,3.886 1.27,3.912 -20.422,4.191 -5.791,4.623 -21.463,4.775 -28.169,4.902 -4.623,5.131 -14.834,5.258 -23.012,5.436 1.536,6.299 -14.859,6.477 -24.765,6.807 -5.867,6.985 -13.614,7.01 1.473,8.687 -2.464,10.465 0.076,10.49 1.321,10.516 -3.912,12.395 -3.251,13.741 -22.911,13.767 -26.67,14.3 -29.54,15.265 -3.277,15.316 1.245,15.672 -26.594,16.18 -29.058,19.05 -0.61,19.542 -27.229,20.05 -21.285,21.565 -17.729,21.717 -12.116,21.742 -7.518,21.768
GNDW: 
LASER_EN: Q3.1 R36.1 U2.24 | length 15.2
  TopLayer w0.254: U2.24@-11.045,10.548 -8.135,10.548 -5.486,7.899 -3.785,7.899 -3.531,7.645 ; R36.1@-3.71,6.856 cw(c-4.252,6.314) Q3.1@-3.486,6.314 ; R36.1@-3.709,7.216 ccw(c-4.135,7.645) -3.531,7.645 ; Q3.1@-3.699,6.096 ccw(c-4.213,6.61) -3.486,6.61 ; R36.1@-3.658,6.816 cw(c-3.958,6.295) -3.377,6.45 ; R36.1@-3.531,6.883 -3.531,7.645 ; Q3.1@-3.486,5.479 R36.1@-3.486,6.883 ; -3.486,6.531 cw(c-3.026,6.531) R36.1@-3.351,6.856 ; R36.1@-3.486,6.856 ccw(c-2.412,6.856) Q3.1@-3.171,6.096 ; -3.373,6.435 cw(c-2.77,6.596) R36.1@-3.311,6.909 ; R36.1@-3.352,7.216 cw(c-2.926,7.645) -3.531,7.645
LPD: 
NetBUZ1_1: BUZ1.1 R33.2 | length 9.4
  TopLayer w0.5: R33.2@-17.831,-36.17 -16.993,-36.17 -16.53,-36.632 BUZ1.1@-16.53,-41.631 ; R33.2@-17.814,-36.001 ccw(c-17.407,-35.593) -17.407,-36.17 ; BUZ1.1@-16.982,-41.179 ccw(c-18.072,-40.088) -16.53,-40.088 ccw(c-14.987,-40.088) BUZ1.1@-16.078,-41.179
NetBUZ1_2: BUZ1.2 Q1.3 | length 11.3
  TopLayer w0.5: BUZ1.2@-11.958,-41.631 -11.958,-40.761 -9.869,-38.673 Q1.3@-9.869,-36.955 ; BUZ1.2@-11.819,-41.631 cw(c-9.385,-41.631) -11.106,-39.909 ; BUZ1.2@-11.319,-41.631 cw(c-7.678,-41.631) -10.252,-39.056 ; Q1.3@-10.046,-37.232 cw(c-10.473,-37.659) -9.869,-37.659 cw(c-9.265,-37.659) Q1.3@-9.692,-37.232
NetC9_1: C9.1 U2.2 | length 3.8
  TopLayer w0.254: C9.1@-19.99,1.448 -19.202,2.235 -18.034,2.235 -17.795,2.474 U2.2@-17.795,3.298 ; C9.1@-19.99,1.638 ccw(c-19.99,2.098) -19.665,1.773
NetC11_2: C11.2 U2.5 | length 2.5
  TopLayer w0.254: U2.5@-16.295,3.298 -16.295,2.325 -15.9,1.93 C11.2@-15.9,1.47 ; C11.2@-15.99,1.623 ccw(c-16.207,1.84) -15.9,1.84 ccw(c-15.594,1.84) C11.2@-15.811,1.623
NetC30_2: C30.2 R12.2 R13.1 U7.1 U7.2 | length 13.8
  TopLayer w0.254: U7.1@-25.146,-0.178 U7.2@-23.216,-0.178 -23.241,-0.203 R12.2@-23.241,-1.676 ; U7.1@-24.966,-0.357 cw(c-24.533,-0.791) -24.533,-0.178 cw(c-24.533,0.435) U7.1@-24.966,0.002 ; R13.1@-24.587,-1.676 R12.2@-23.241,-1.676 ; R13.1@-24.408,-1.856 cw(c-23.974,-2.29) -23.974,-1.676 cw(c-23.974,-1.063) R13.1@-24.408,-1.497 ; R12.2@-23.395,-1.856 ccw(c-23.829,-2.29) -23.829,-1.676 ccw(c-23.829,-1.063) -23.395,-1.497 ccw(c-23.767,-1.125) -23.241,-1.125 ; U7.2@-23.395,-0.611 cw(c-23.767,-0.984) -23.241,-0.984 ; U7.2@-23.395,-0.357 ccw(c-23.829,-0.791) -23.829,-0.178 ccw(c-23.829,0.435) U7.2@-23.395,0.002 ; -23.241,-1.106 cw(c-22.541,-1.106) U7.2@-23.036,-0.611 ; -23.241,-1.002 ccw(c-22.541,-1.002) -23.036,-1.497 ccw(c-22.602,-1.063) -22.602,-1.676 ccw(c-22.602,-2.29) R12.2@-23.036,-1.856 ; -22.656,-1.676 ccw(c-22.656,-0.89) C30.2@-22.1,-1.446 ; -22.411,-1.676 cw(c-22.411,-2.116) C30.2@-22.1,-1.805 ; C30.2@-21.971,-1.676 R12.2@-23.216,-1.676 R12.2@-23.241,-1.676